# EAGLE board Bubbler Wifi Expansion (EAGLE 6.4)
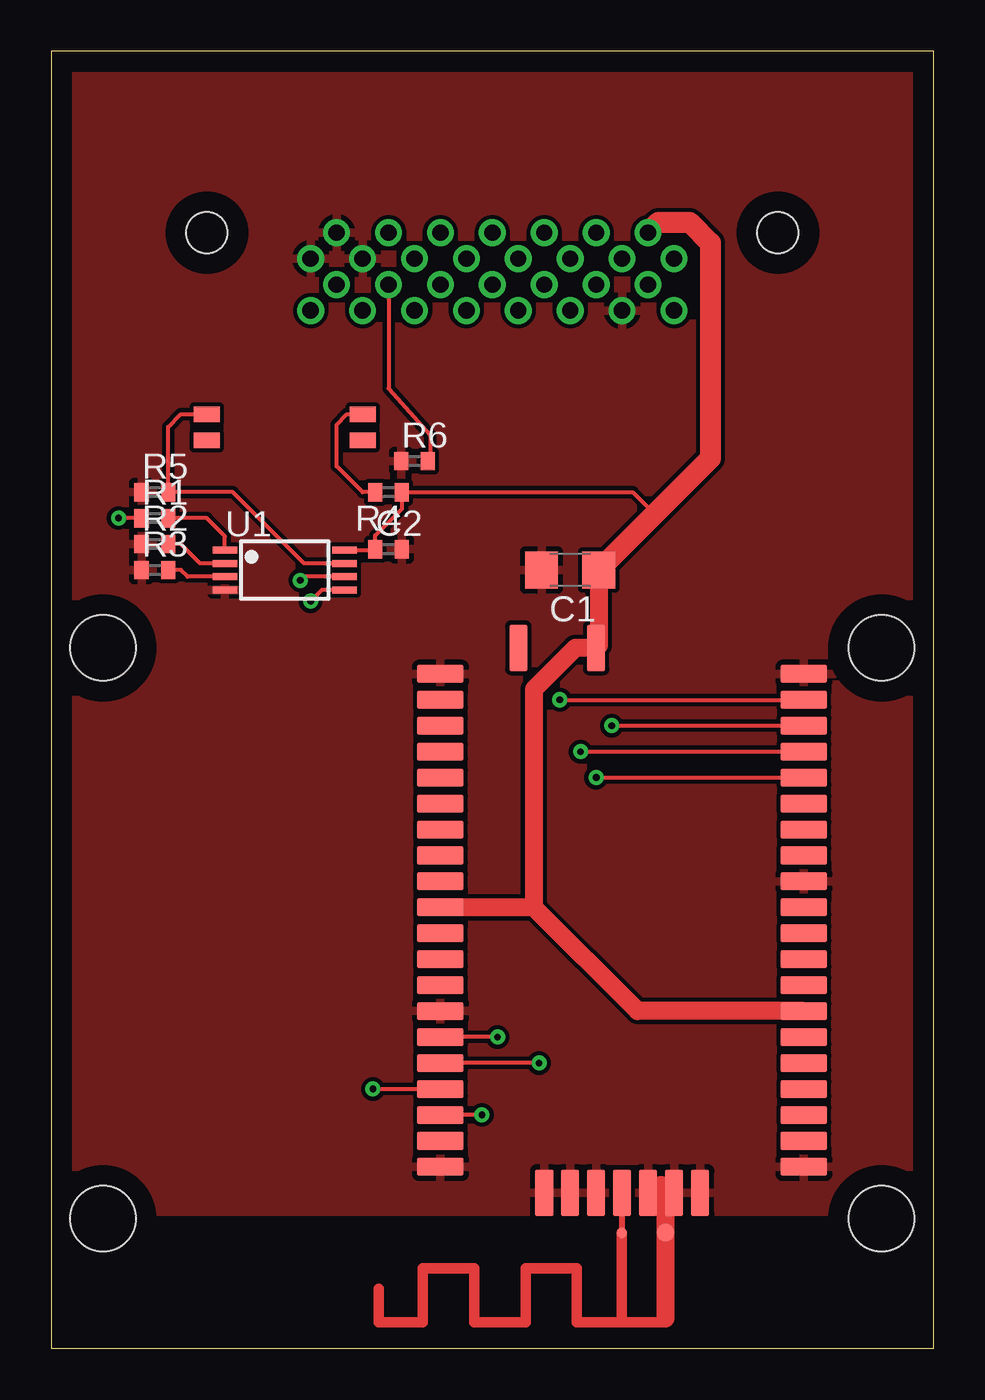
[diagram p0: board, top side]
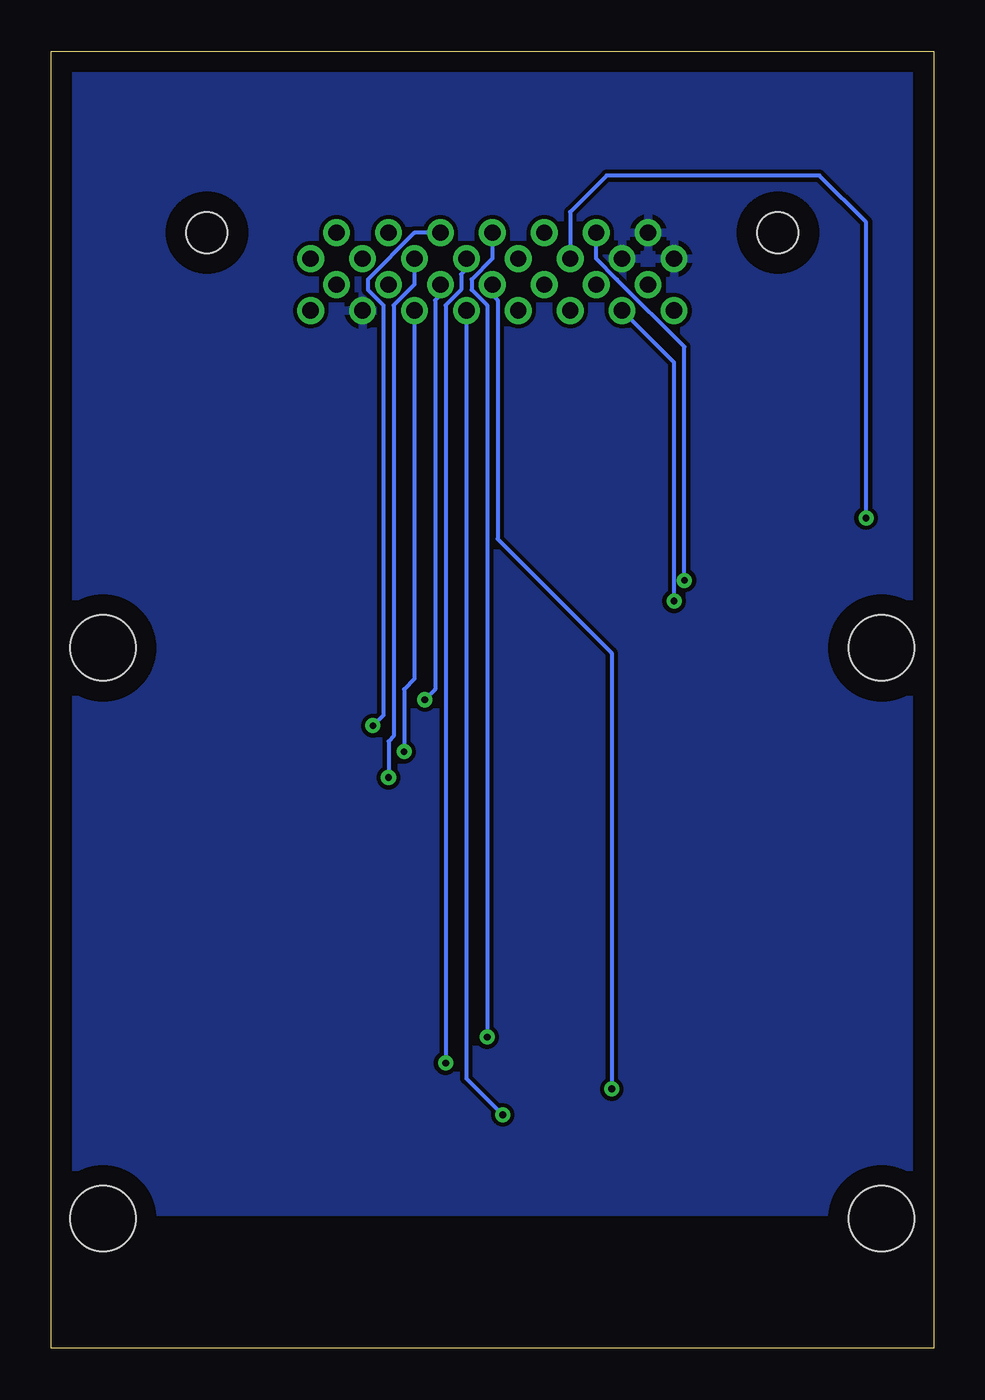
[diagram p1: board, bottom side, seen from below]

Size 43.18 x 63.5 mm. Coordinates in mm from the lower left corner, seen from the top.
Outline: 0,0 43.18,0 43.18,63.5 0,63.5 0,0
Copper layers (1*16): Top 0.035mm / dielectric 1.5mm / Bottom 0.035mm
Design rules "default": minimum track width 10mil, minimum drill 24mil, track to track 8mil, track to pad 8mil, pad to pad 8mil, via to via 8mil, smd to smd 8mil, copper to edge 40mil, drill to drill 8mil, minimum pad ring 10mil, minimum via ring 8mil, stop-mask expansion 4mil, vias tented up to drill 0mil, thermal gap 10mil
Holes 3.2 mm at 2.54,34.29 2.54,6.35 40.64,6.35 40.64,34.29
tRestrict: area 0,0 to 43.2,6.3
bRestrict: area 0,0 to 43.2,6.3

## Footprints (pad centres in the part's own frame; a part is rotated, then mirrored left to right if it is on the bottom)
C1206 = smd 1.6 x 1.8: 1 -1.4,0; 2 1.4,0
C0402 = smd 0.7 x 0.9: 1 -0.65,0; 2 0.65,0
R0402 = smd 0.7 x 0.9: 1 -0.65,0; 2 0.65,0
TSSOP8 = smd 1.2 x 0.35: 1 -2.925,0.975; 2 -2.925,0.325; 3 -2.925,-0.325; 4 -2.925,-0.975; 5 2.925,-0.975; 6 2.925,-0.325; 7 2.925,0.325; 8 2.925,0.975
WIFI-RN-171 = smd 0.889 x 2.286: P1 0,0; P2 -1.27,0; P3 -2.54,0; P4 -3.81,0; P5 -5.08,0; P6 -6.35,0; P7 -7.62,0; P8 -8.89,0; P9 -10.16,0; P10 -11.43,0; P11 -12.7,0; P12 -13.97,0; P13 -15.24,0; P14 -16.51,0; P15 -17.78,0; P16 -19.05,0; P17 -20.32,0; P18 -21.59,0; P19 -22.86,0; P20 -24.13,0; P28 -24.13,-17.78; P29 -22.86,-17.78; P30 -21.59,-17.78; P31 -20.32,-17.78; P32 -19.05,-17.78; P33 -17.78,-17.78; P34 -16.51,-17.78; P35 -15.24,-17.78; P36 -13.97,-17.78; P37 -12.7,-17.78; P38 -11.43,-17.78; P39 -10.16,-17.78; P40 -8.89,-17.78; P41 -7.62,-17.78; P42 -6.35,-17.78; P43 -5.08,-17.78; P44 -3.81,-17.78; P45 -2.54,-17.78; P46 -1.27,-17.78; P47 0,-17.78 | smd 2.286 x 0.889: P21 -25.4,-5.08; P22 -25.4,-6.35; P23 -25.4,-7.62; P24 -25.4,-8.89; P25 -25.4,-10.16; P26 -25.4,-11.43; P27 -25.4,-12.7; P48 1.27,-3.81; P49 1.27,-7.62
SWITCH-DIP-GDH-02 = smd 0.762 x 1.27: P1 0,0; P2 1.27,0; P3 1.27,7.62; P4 0,7.62
CONNECTOR-JAE-TX24-30M = drill 0.8: P1 -8.89,3.81; P2 -8.89,1.27; P3 -7.62,2.54; P4 -7.62,0; P5 -6.35,3.81; P6 -6.35,1.27; P7 -5.08,2.54; P8 -5.08,0; P9 -3.81,3.81; P10 -3.81,1.27; P11 -2.54,2.54; P12 -2.54,0; P13 -1.27,3.81; P14 -1.27,1.27; P15 0,2.54; P16 0,0; P17 1.27,3.81; P18 1.27,1.27; P19 2.54,2.54; P20 2.54,0; P21 3.81,3.81; P22 3.81,1.27; P23 5.08,2.54; P24 5.08,0; P25 6.35,3.81; P26 6.35,1.27; P27 7.62,2.54; P28 7.62,0; P29 8.89,3.81; P30 8.89,1.27 | hole 2: -13.97,0; 13.97,0
RN-171-ANTENNA = smd 0.508 x 0.508: ANTENNA 4.394,2.159 | smd 0.889 x 0.889: GND 4.394,0

## Placement (x,y rotation side)
C1  [C1206]  25.4,38.1 180 top
C2  [C0402]  16.51,39.12 0 top
R1  [R0402]  5.08,40.64 0 top
R2  [R0402]  5.08,39.37 0 top
R3  [R0402]  5.08,38.1 0 top
R4  [R0402]  16.51,41.91 180 top
R5  [R0402]  5.08,41.91 0 top
R6  47K  [R0402]  17.78,43.43 0 top
U1  EEPROM-ST-M24C64  [TSSOP8]  11.43,38.1 0 top
U2  WIFI-RN-171  [WIFI-RN-171]  19.05,33.02 90 top
U$1  SWITCH-DIP-GDH-02  [SWITCH-DIP-GDH-02]  7.62,45.72 270 top
U$2  BUBBLER_CARD  [CONNECTOR-JAE-TX24-30M]  21.59,54.61 180 top
U$3  ANTENNA-RN-171  [RN-171-ANTENNA]  30.07,1.27 90 top

## Library data of the parts
C1 C2 R1-R6 = rcl
U1 U2 U$1-U$3 = Pygmy

## Nets
3.3V: C1.1 C2.1 R4.1 U1.8 U2.P10 U2.P34 U2.P49 U$2.P4
CARD_ID: R1.1 U$2.P22
CARD_SCL: U1.6 U$2.P24
CARD_SDA: U1.5 U$2.P25
CTS: U2.P44 U$2.P9
GND: C1.2 C2.2 R2.1 R3.1 R5.1 R6.1 U1.4 U2.P1 U2.P14 U2.P20 U2.P21 U2.P22 U2.P23 U2.P25 U2.P26 U2.P27 U2.P28 U2.P39 U2.P47 U$2.P5 U$2.P26 U$2.P28 U$2.P30 U$3.GND
N$1: U$2.P29
N$2: U$2.P27
N$3: R3.2 U1.3
N$4: R2.2 U1.2
N$5: R1.2 U1.1
N$6: R5.2 U1.7 U$1.P1
N$7: R6.2 U$2.P23
N$8: R4.2 U$1.P4
N$9: U2.P24 U$3.ANTENNA
RTS: U2.P43 U$2.P10
RX: U2.P45 U$2.P12
TX: U2.P46 U$2.P11
WIFI_CS: U2.P18 U$2.P13
WIFI_MISO: U2.P17 U$2.P15
WIFI_MOSI: U2.P15 U$2.P16
WIFI_SCK: U2.P16 U$2.P14

## Tracks (layer width: path | path; a pad name or v marks a point on that pad's centre or on a via)
3.3V
  Top 0.203: U1.8 15.82,39.08 C2.1 15.86,39.79 17.17,41.1 17.17,41.81 | 17.17,41.81 R4.1 | 17.17,41.81 17.27,41.91 28.45,41.91 29.53,40.83
  Top 0.889: C1.1 26.8,34.42 U2.P49 25.65,34.29 23.62,32.26 23.62,21.59 | 23.62,21.59 U2.P10 | U2.P34 28.7,16.51 23.62,21.59
  Top 1.016: U$2.P4 29.72,55.12 31.24,55.12 32.26,54.1 32.26,43.56 29.53,40.83 C1.1
CARD_ID  (via drill 0.33)
  Top 0.203: R1.1 v3.3,40.64
  Bottom 0.203: v3.3,40.64 3.3,55.12 5.59,57.4 16,57.4 17.78,55.63 U$2.P22
CARD_SCL  (via drill 0.33)
  Top 0.203: U1.6 12.38,37.77 v12.19,37.59
  Bottom 0.203: v12.19,37.59 12.19,49.02 15.49,52.32 16.51,53.34 U$2.P24
CARD_SDA  (via drill 0.33)
  Top 0.203: U1.5 13.25,37.12 v12.7,36.58
  Bottom 0.203: v12.7,36.58 12.7,48.26 U$2.P25
CTS  (via drill 0.33)
  Top 0.203: v25.91,29.21 U2.P44
  Bottom 0.203: U$2.P9 25.4,32.77 25.91,32.26 v25.91,29.21
GND
  Top 0.254: U2.P26 30.2,7.62 30.07,7.49
  Top 0.889: U$3.GND 30.07,7.49
  Top 1.422: 30.07,7.49 29.84,7.72
  pour Bottom: -2.54,66.04 45.72,66.04 45.72,-2.54 -2.54,-2.54
  pour Top: -1.27,64.77 44.45,64.77 44.45,-1.27 -1.27,-1.27
N$3
  Top 0.203: U1.3 6.67,37.77 6.35,38.1 R3.2
N$4
  Top 0.203: U1.2 7.29,38.42 6.35,39.37 R2.2
N$5
  Top 0.203: U1.1 8.51,39.76 7.62,40.64 R1.2
N$6
  Top 0.203: U$1.P1 6.35,45.72 5.73,45.1 R5.2 8.89,41.91 12.38,38.42 U1.7
N$7
  Top 0.203: U$2.P23 16.51,46.99 18.54,44.7 18.54,43.29 R6.2
N$8
  Top 0.203: R4.2 15.24,41.91 13.97,43.18 13.97,45.21 14.48,45.72 U$1.P4
N$9
  Top 0.305: U2.P24 27.91,7.62 U$3.ANTENNA
RTS  (via drill 0.33)
  Top 0.203: v26.67,27.94 U2.P43
  Bottom 0.203: U$2.P10 25.4,52.07 26.42,51.05 26.42,29.97 26.67,29.72 v26.67,27.94
RX  (via drill 0.33)
  Top 0.203: v27.43,30.48 U2.P45 | U2.P45 37.08,30.48 37.34,30.23 37.08,30.23 U2.P45
  Bottom 0.203: U$2.P12 25.4,54.61 27.69,52.32 27.69,51.82 26.92,51.05 26.92,30.99 v27.43,30.48
TX  (via drill 0.33)
  Top 0.203: v24.89,31.75 U2.P46
  Bottom 0.203: U$2.P11 24.13,51.56 24.38,51.31 24.38,32.26 v24.89,31.75
WIFI_CS  (via drill 0.33)
  Top 0.203: v21.08,11.43 U2.P18
  Bottom 0.203: U$2.P13 22.86,13.21 v21.08,11.43
WIFI_MISO  (via drill 0.33)
  Top 0.203: v15.75,12.7 U2.P17
  Bottom 0.203: U$2.P15 21.59,51.56 21.34,51.31 21.34,39.62 15.75,34.04 v15.75,12.7
WIFI_MOSI  (via drill 0.33)
  Top 0.203: v21.84,15.24 U2.P15
  Bottom 0.203: U$2.P16 21.59,53.34 22.61,52.32 22.61,51.82 21.84,51.05 v21.84,15.24
WIFI_SCK  (via drill 0.33)
  Top 0.203: v23.88,13.97 U2.P16
  Bottom 0.203: U$2.P14 22.86,52.83 23.11,52.58 23.11,51.82 23.88,51.05 v23.88,13.97